# Altium PCB PCB3 - 5x5 - placement V2.PcbDoc
Units mm, origin at the board's own origin, x right, y up, seen from the top; angles counter-clockwise.
Board outline 50 x 50 mm, 2 copper layers (Top Layer, Bottom Layer); 101 components, 75 nets, 289 pads, 81 vias.
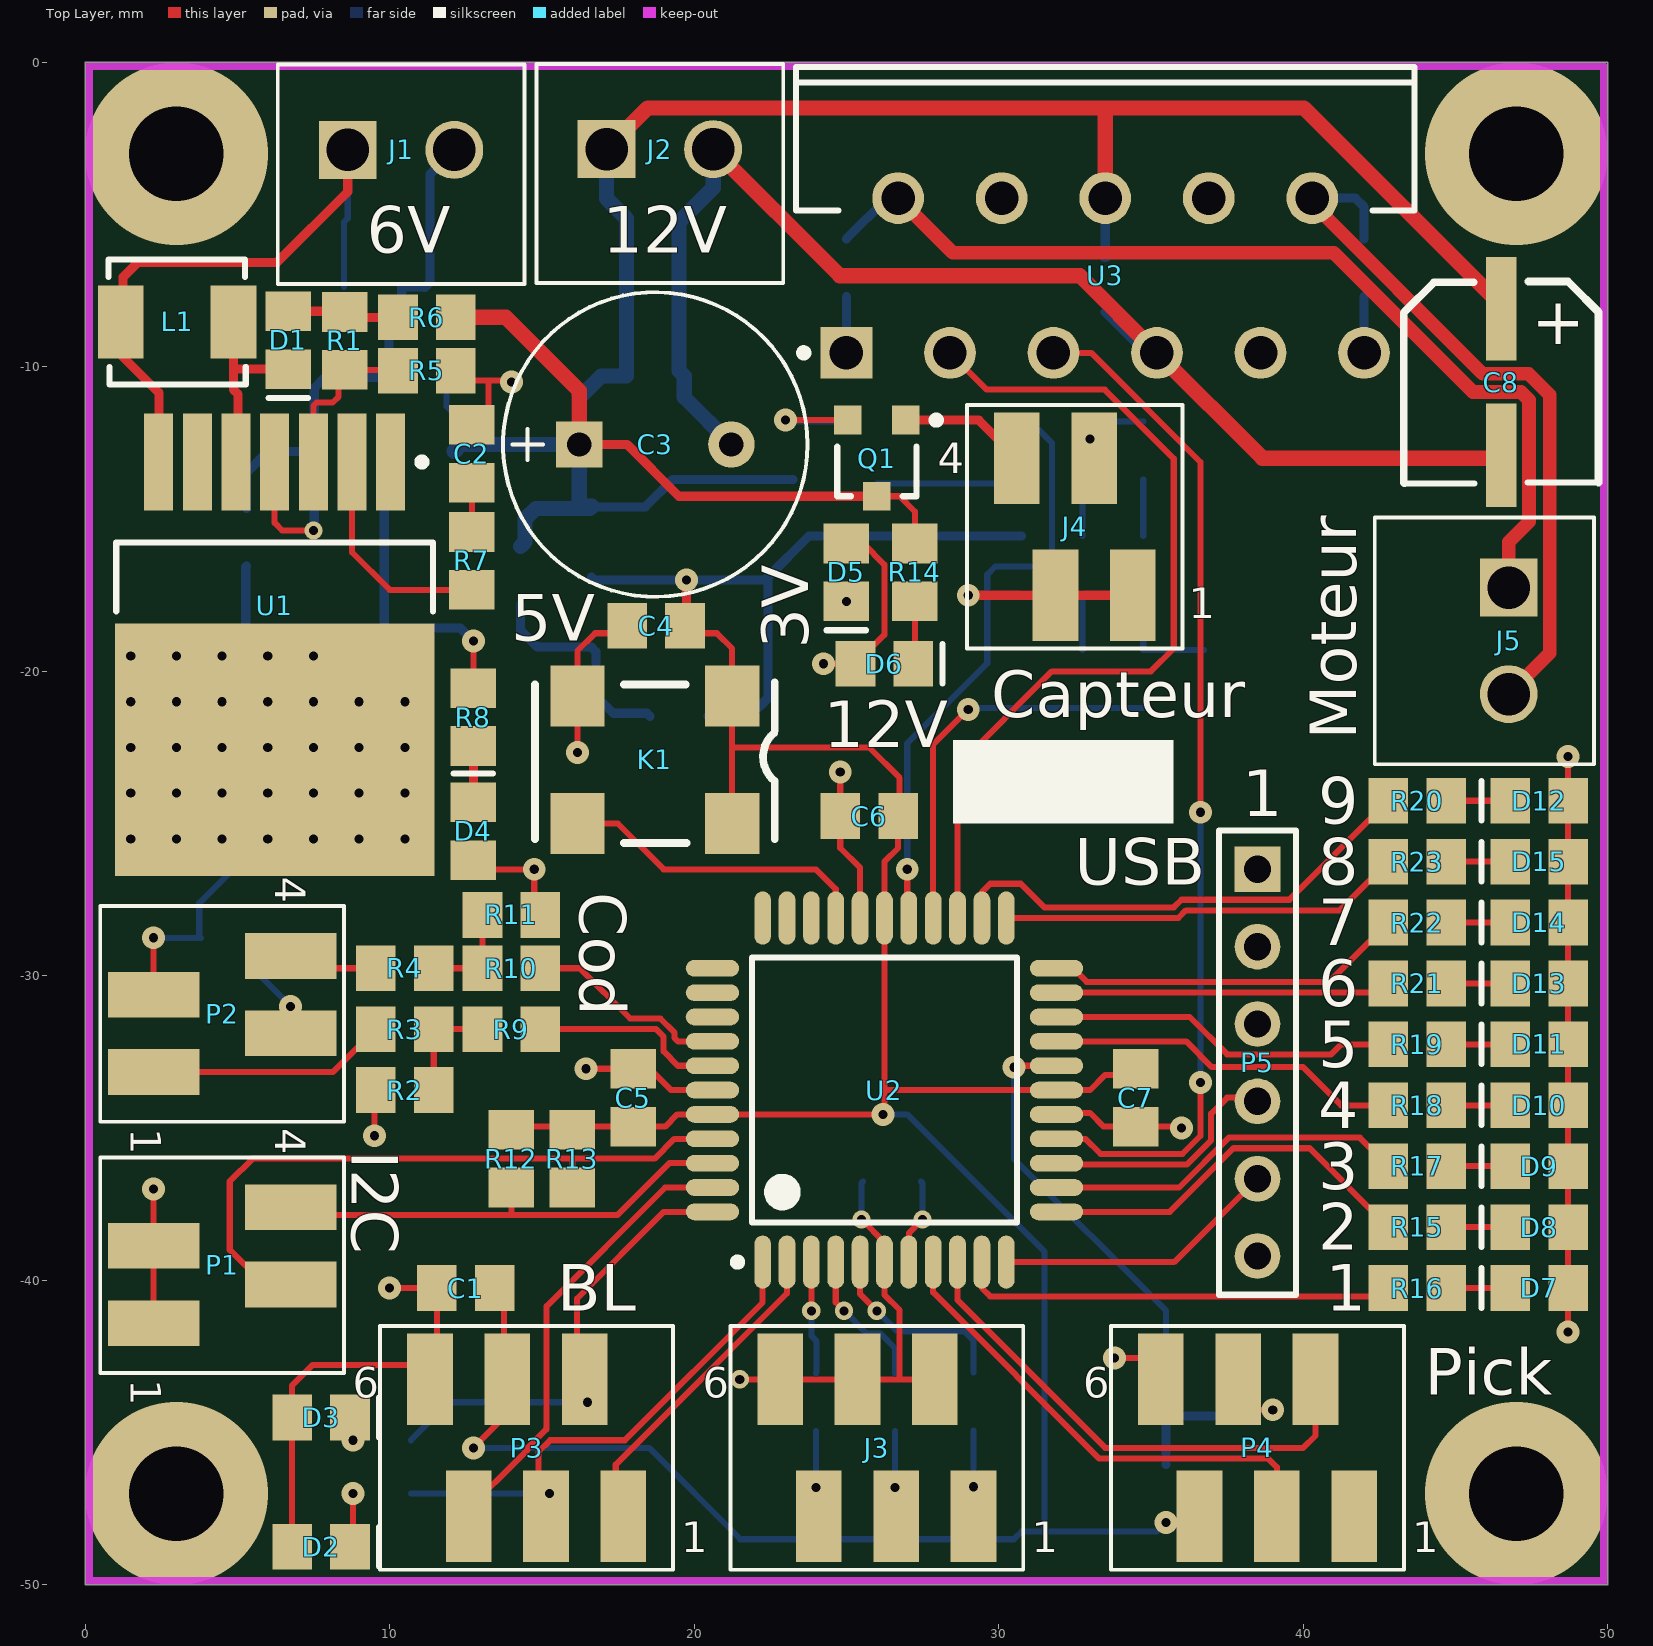
[diagram p0: Top Layer view]
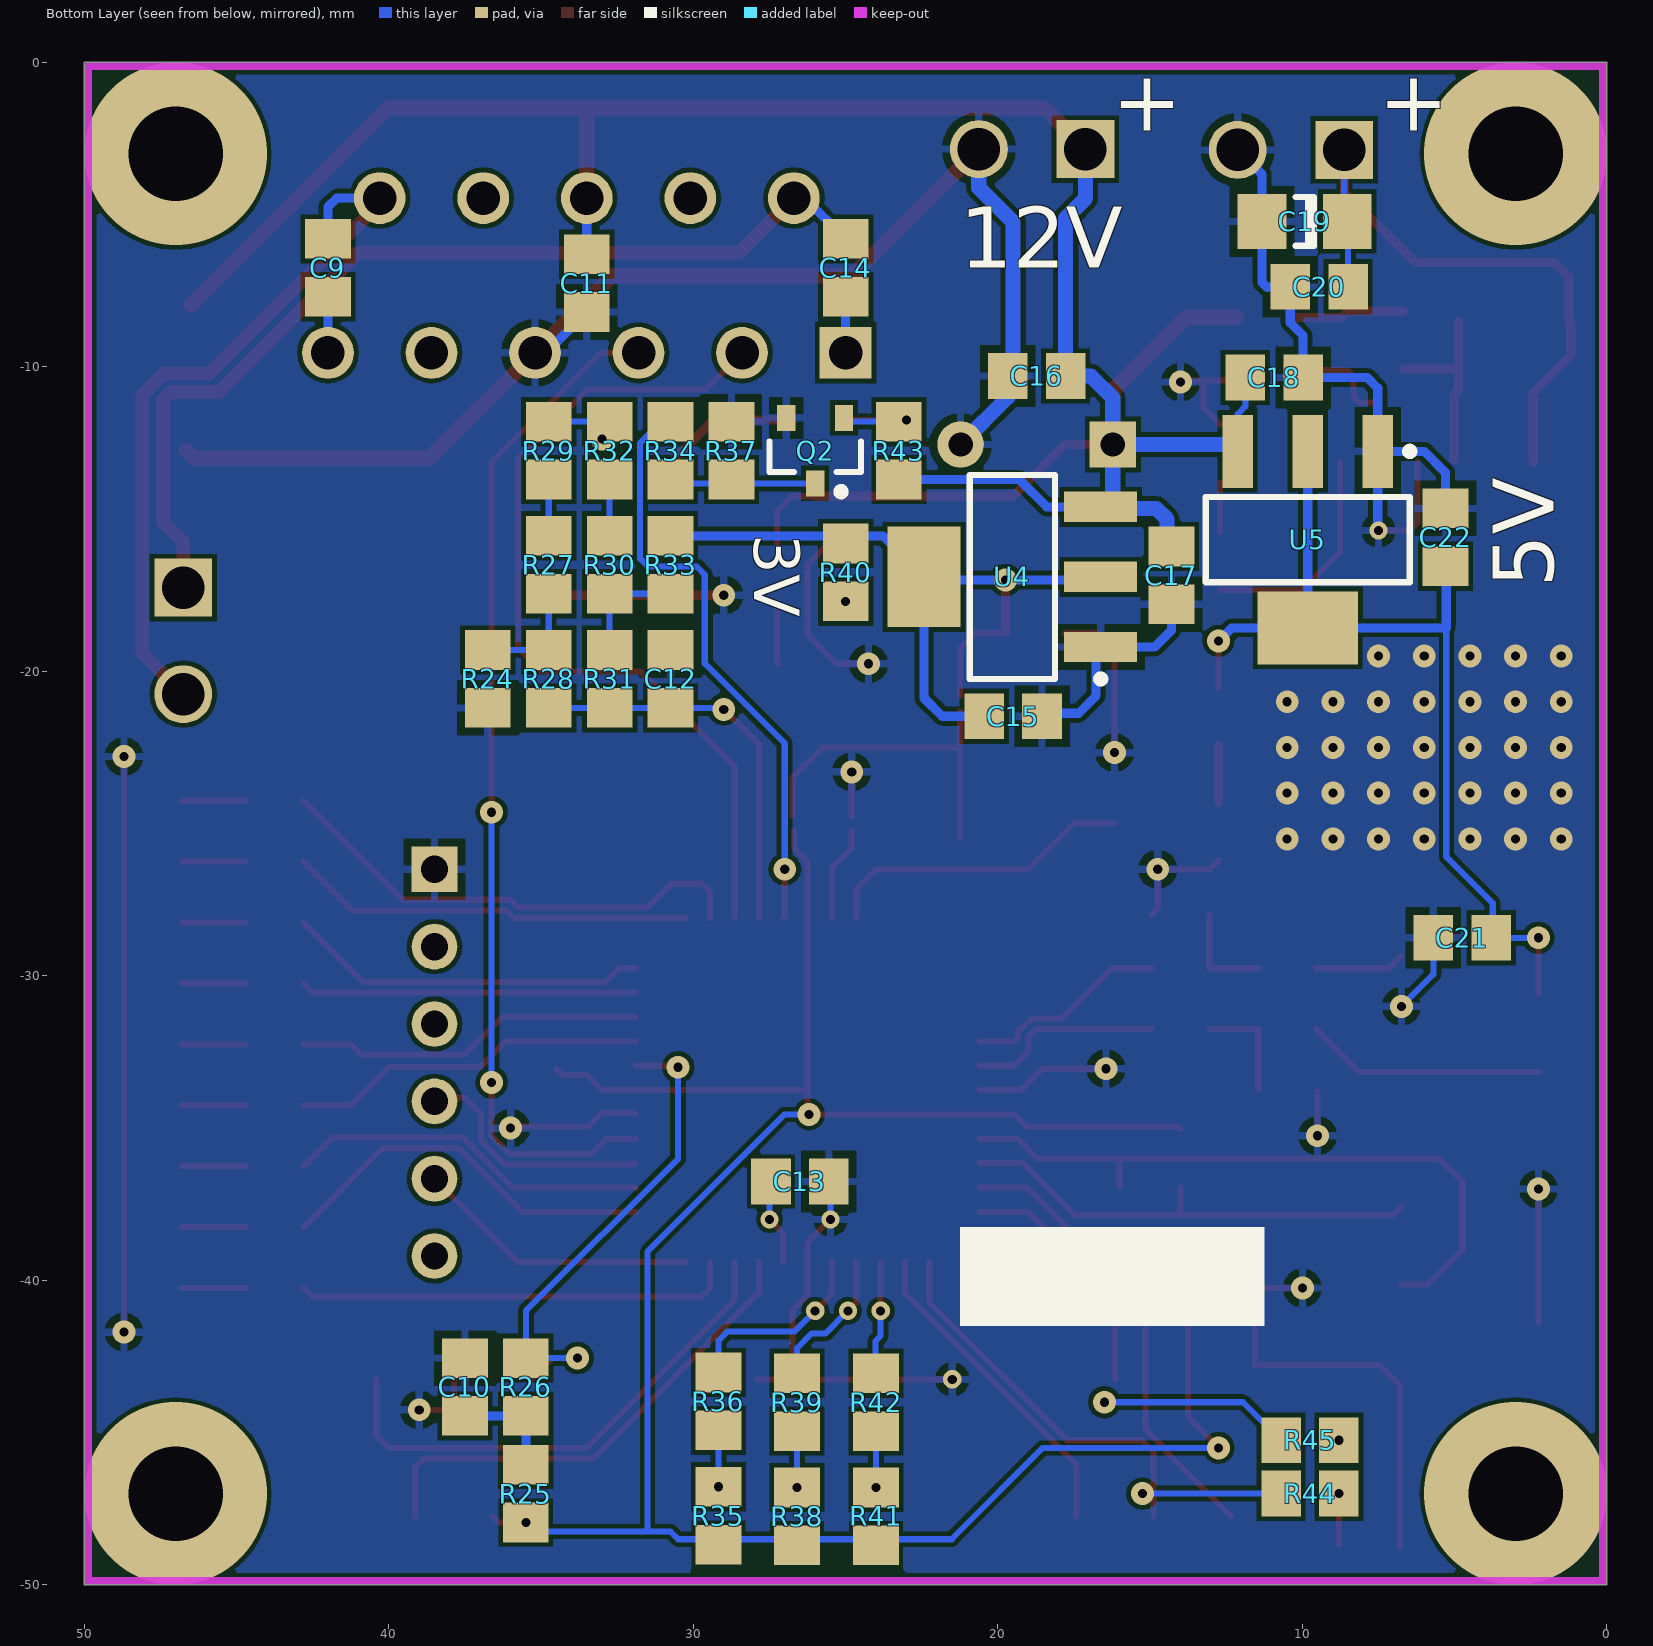
[diagram p1: Bottom Layer view, seen from below]
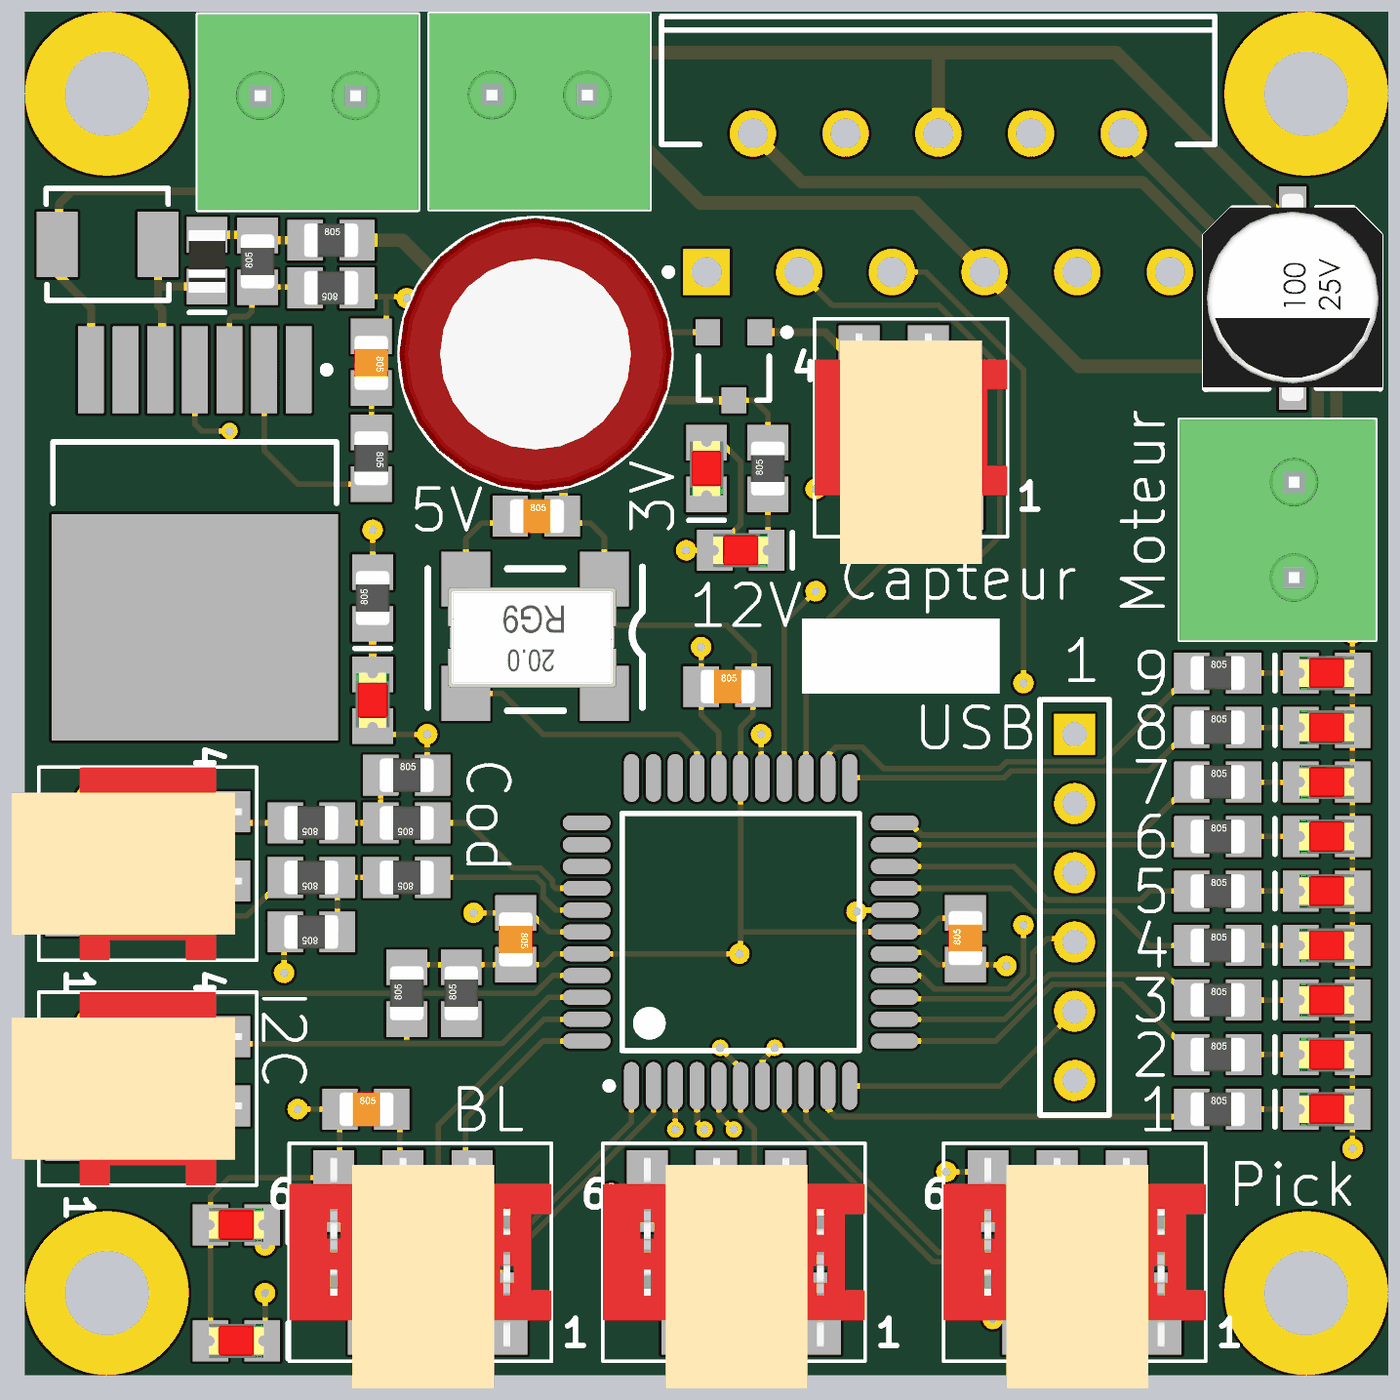
[diagram p2: 3D render of the assembled board from above, using the file's embedded part models]
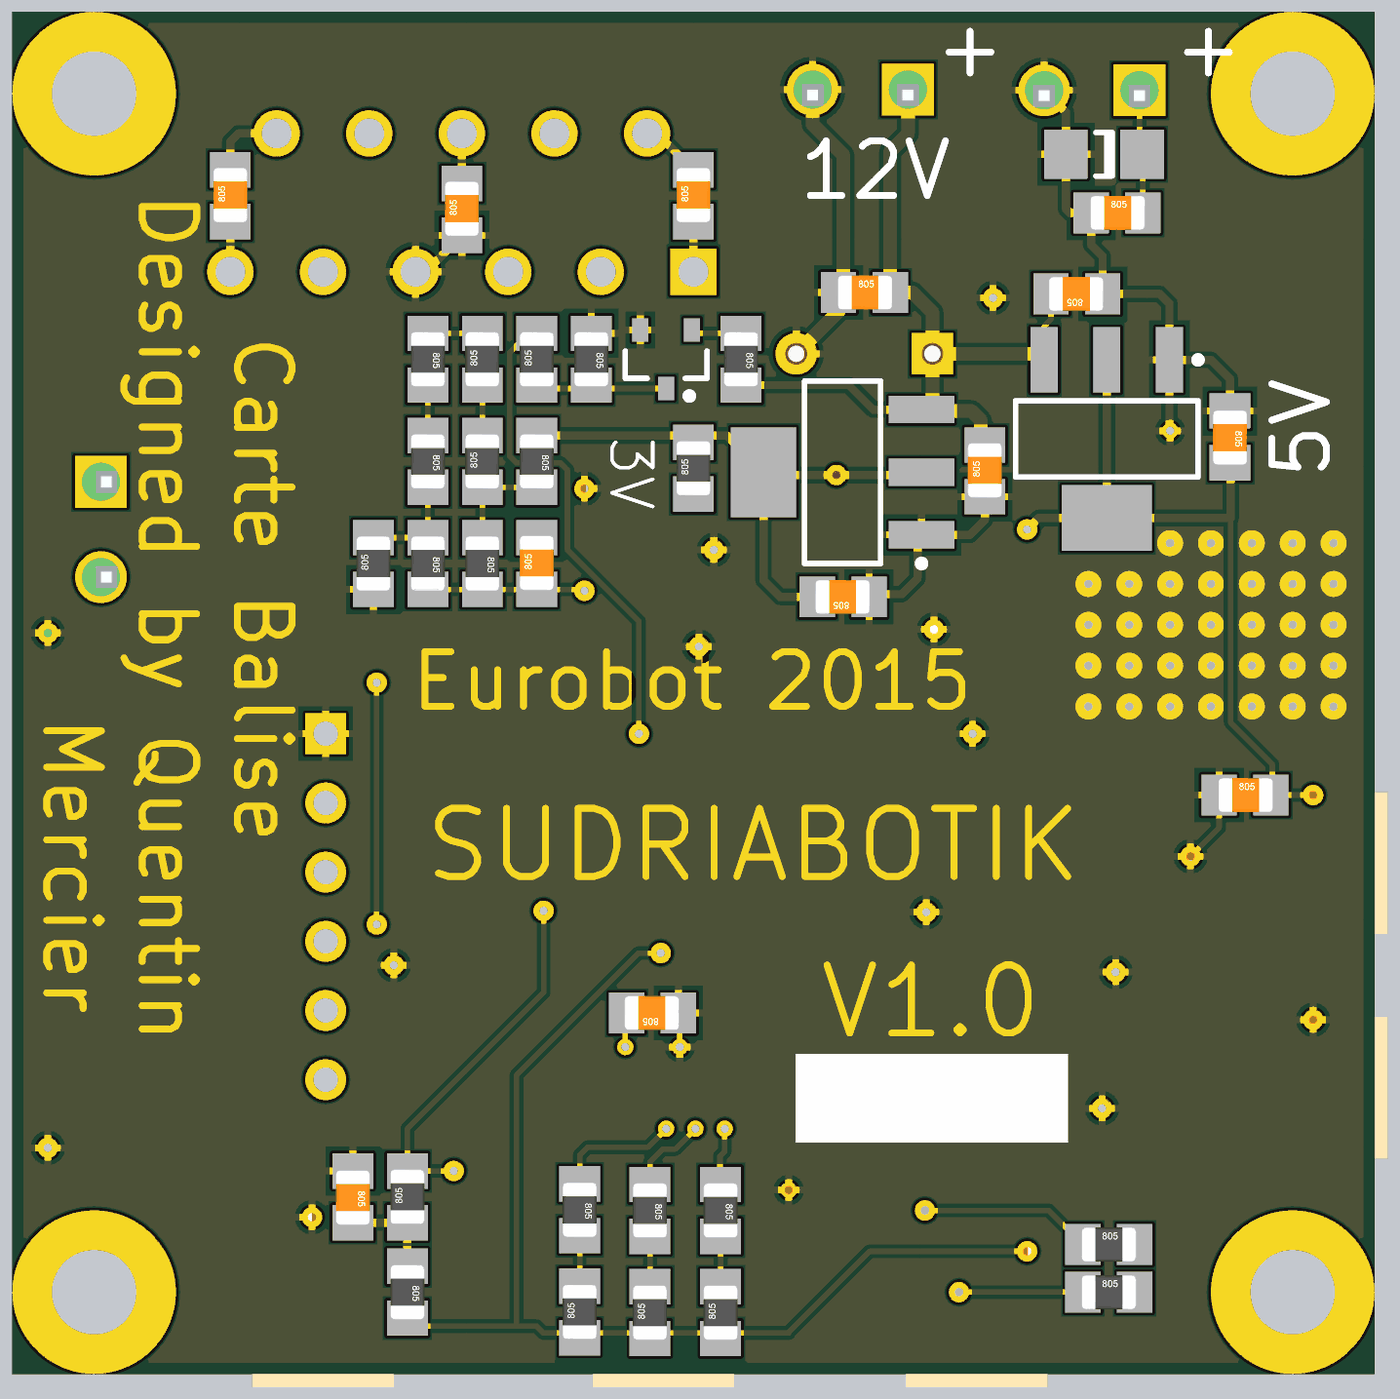
[diagram p3: 3D render of the assembled board from below, using the file's embedded part models]

## Layer stack, top to bottom
Top Solder: solder mask 0.0102, Solder Resist, Dk 3.5
Top Layer: signal copper 0.0356
Dielectric 1: dielectric 0.32, FR-4, Dk 4.8
Bottom Layer: signal copper 0.0356
Bottom Solder: solder mask 0.0102, Solder Resist, Dk 3.5

## Board outline
0,0 50,0 50,-50 0,-50

## Design rules (kind name [scope] priority, off if disabled: settings)
Clearance "Stitching GND" [IsStitchingVia and InNet('GND') vs (IsVia and (Not IsStitchingVia)) Or IsPad] p1: gap=0.127
Clearance Clearance_2 [InNamedPolygon('GND_L02_P001')] p2: gap=0.2
Clearance Clearance_1 [InNamedPolygon('GND_L02_P001')] p3: gap=0.254
Clearance [All] p4: gap=0.15
MinimumSolderMaskSliver [All] p1: minsoldermaskwidth=0.127
PolygonConnect "test 1" [All vs IsNamedPolygon('plan boost')] p1: connectstyle=Direct reliefconductorwidth=0.254 reliefentries=4 polygonreliefangle="90 Angle" airgapwidth=0.254
PolygonConnect [All] p2: connectstyle=Relief reliefconductorwidth=0.254 reliefentries=4 polygonreliefangle="90 Angle" airgapwidth=0.254
RoutingVias [All] p1: holewidth=0.3 width=0.75 viastyle="Through Hole" minholewidth=0.3 minwidth=0.6 maxholewidth=4 maxwidth=6
SilkToSilkClearance [All] p1: silktosilkclearance=0.127
SilkToSolderMaskClearance [IsPad] p1: minsilkscreentomaskgap=0.127 clearancetoexposedcopper=TRUE
SolderMaskExpansion [All] p1: expansion=0.102
Width [All] p1: maxlimit=2 minlimit=0.2 preferedwidth=0.2
27 further rules are at their usual default settings.

## Classes and differential pairs
component class "Sheet 4 - Capteurs": C12 J3 J4 Q1 Q2 R24 R27 R28 R29 R30 R31 R32 R33 R34 R35 R36 R37 R38 R39 R41 R42 R43
component class "Sheet 3 - Alims": C2 C3 C15 C16 C17 C18 C19 C20 C22 D1 D4 D5 D6 J1 J2 L1 R1 R5 R6 R7 R8 R14 R40 U1 U4 U5
component class "Sheet 2 - Moteurs": C8 C9 C11 C14 C21 J5 P2 R2 R3 R4 R9 R10 R11 U3
component class "Sheet 1 - Micro": C1 C4 C5 C6 C7 C10 C13 D2 D3 D7 D8 D9 D10 D11 D12 D13 D14 D15 K1 P1 P3 P4 P5 R12 R13 R15 R16 R17 R18 R19 R20 R21 R22 R23 R25 R26 R44 R45 R46 U2

## Components (designator, comment, footprint, x,y, rotation, side; value= is the part's Value field where it differs from the comment)
C1 "100pF" C0805 12.5,-40.25 r0 top
C2 "200nF" C0805 12.7,-12.85 r270 top
C3 "1200uF" CAPA_D10_E5 18.725,-12.55 r0 top
C4 "100nF" C0805 18.75,-18.5 r0 top
C5 "100nF" C0805 18,-34 r270 top
C6 "100nF" C0805 25.75,-24.75 r0 top
C7 "100nF" C0805 34.5,-34 r90 top
C8 "220uF" "CAPA CMS D6.3_E1.8" 46.5,-10.5 r90 top
C9 "10nF" C0805 42,-6.75 r90 bottom
C10 "0.1uF" C0805 37.5,-43.5 r270 bottom
C11 "1uF" C0805 33.5,-7.25 r90 bottom
C12 "100pF" C0805 30.75,-20.25 r90 bottom
C13 "100nF" C0805 26.5,-36.75 r0 bottom
C14 "10nF" C0805 25,-6.75 r90 bottom
C15 "10uF" C0805 19.5,-21.475 r0 bottom
C16 "100nF" C0805 18.725,-10.3 r180 bottom
C17 "1UF" C0805 14.3,-16.85 r90 bottom
C18 "1uF" C0805 10.925,-10.35 r0 bottom
C19 "100uF" C1206 9.925,-5.225 r0 bottom
C20 "100nF" C0805 9.45,-7.375 r180 bottom
C21 "100nF" C0805 4.75,-28.75 r180 bottom
C22 "10uF" C0805 5.3,-15.6 r270 bottom
D1 "D Schottky" D0805 6.675,-9.125 r90 top
D2 "LED" "LED 0805" 7.75,-48.75 r180 top
D3 "LED" "LED 0805" 7.75,-44.5 r180 top
D4 "LED" "LED 0805" 12.75,-25.25 r270 top
D5 "LED" "LED 0805" 25,-16.75 r90 top
D6 "LED" "LED 0805" 26.25,-19.75 r180 top
D7 "LED" "LED 0805" 47.75,-40.25 r0 top
D8 "LED" "LED 0805" 47.75,-38.25 r0 top
D9 "LED" "LED 0805" 47.75,-36.25 r0 top
D10 "LED" "LED 0805" 47.75,-34.25 r0 top
D11 "LED" "LED 0805" 47.75,-32.25 r0 top
D12 "LED" "LED 0805" 47.75,-24.25 r0 top
D13 "LED" "LED 0805" 47.75,-30.25 r0 top
D14 "LED" "LED 0805" 47.75,-28.25 r0 top
D15 "LED" "LED 0805" 47.75,-26.25 r0 top
J1 "WE Type 691321100002" 691321100002 10.375,-2.875 r0 top
J2 "WE Type 691321100002" 691321100002 18.875,-2.85 r0 top
J3 "Mini connect" 690367280676 26,-45.5 r0 top
J4 "WE 4 pins" 690367280476 32.5,-15.25 r0 top
J5 "WE Type 691321100002" 691321100002 46.75,-19 r270 top
K1 "Quartz 10Mhz" IQXO-70 21.25,-25 r180 top
L1 "15uH" "INDUCTANCE 4.06 X 4.45" 3.025,-8.525 r0 top
P1 "mini connect" 690367280476 4.5,-39.5 r270 top
P2 "WE 4 pins" 690367280476 4.5,-31.25 r270 top
P3 "Mini connect" 690367280676 14.5,-45.5 r0 top
P4 "mini connect" 690367280676 38.5,-45.5 r0 top
P5 "Header 6" HDR1X6 38.5,-26.5 r270 top
Q1 "MOSFET P" SOT-23 26,-13 r180 top
Q2 "Transistor NPN" SOT23_L 26,-12.75 r270 bottom
R1 "17K4" 0805 8.525,-9.15 r90 top
R2 "15K" 0805 10.5,-33.75 r180 top
R3 "10K" 0805 10.5,-31.75 r180 top
R4 "10K" 0805 10.5,-29.75 r180 top
R5 "2K" 0805 11.225,-10.125 r180 top
R6 "0R" 0805 11.225,-8.375 r0 top
R7 "1K" 0805 12.7,-16.375 r270 top
R8 "470R" 0805 12.75,-21.5 r90 top
R9 "470R" 0805 14,-31.75 r180 top
R10 "470R" 0805 14,-29.75 r180 top
R11 "15K" 0805 14,-28 r0 top
R12 "10K" 0805 14,-36 r90 top
R13 "10K" 0805 16,-36 r90 top
R14 "1K" 0805 27.25,-16.75 r90 top
R15 "330R" 0805 43.75,-38.249 r0 top
R16 "330R" 0805 43.75,-40.25 r0 top
R17 "330R" 0805 43.75,-36.25 r0 top
R18 "330R" 0805 43.75,-34.25 r0 top
R19 "330R" 0805 43.75,-32.25 r0 top
R20 "330R" 0805 43.75,-24.25 r0 top
R21 "330R" 0805 43.75,-30.25 r0 top
R22 "330R" 0805 43.75,-28.25 r0 top
R23 "330R" 0805 43.75,-26.25 r0 top
R24 "3K4" 0805 36.75,-20.25 r90 bottom
R25 "10K" 0805 35.5,-47 r270 bottom
R26 "100R" 0805 35.5,-43.5 r90 bottom
R27 "10K" 0805 34.75,-16.5 r270 bottom
R28 "0R" 0805 34.75,-20.25 r270 bottom
R29 "0R" 0805 34.75,-12.75 r270 bottom
R30 "1K" 0805 32.75,-16.5 r90 bottom
R31 "0R" 0805 32.75,-20.25 r270 bottom
R32 "0R" 0805 32.75,-12.75 r90 bottom
R33 "215K" 0805 30.75,-16.5 r270 bottom
R34 "1K" 0805 30.75,-12.75 r90 bottom
R35 "10K" 0805 29.175,-47.725 r90 bottom
R36 "470R" 0805 29.175,-43.975 r270 bottom
R37 "10K" 0805 28.75,-12.75 r270 bottom
R38 "10K" 0805 26.595,-47.75 r90 bottom
R39 "470R" 0805 26.595,-44 r270 bottom
R40 "330R" 0805 25,-16.75 r90 bottom
R41 "10K" 0805 24,-47.75 r90 bottom
R42 "470R" 0805 24,-44 r270 bottom
R43 "10K" 0805 23.25,-12.75 r270 bottom
R44 "330R" 0805 9.75,-47 r180 bottom
R45 "330R" 0805 9.75,-45.25 r180 bottom
U1 "LM2588S-ADJ" TS7B_N 6.225,-19.125 r270 top locked
U2 "DSPIC33FJ128MC804T-I/PT" TQFP-PT44_N 26.25,-33.75 r90 top
U3 "LMD18200T" TA11B 33.5,-7 r0 top
U4 "LM1117MP-3.3" MP04A_N 19.525,-16.9 r0 bottom
U5 "LM1117IMP-5.0" MP04A_N 9.825,-15.675 r270 bottom

## Footprints (in the part's own frame and the unit in brackets; to place one, negate y for a bottom-side part, rotate by r counter-clockwise, add the part's x,y. Pads: shape width x height; smd on the part's side, far side on the other; paste and mask are expansions set on the pad)
0805 [mm] "Chip Resistor; Body 2.0 x 1.3 mm (LxW typ)"
  rect 1.3x1.5 smd: 1(-0.95,0) 2(0.95,0)
  body extent -1,-0.62 1,0.63, height 0.78
690367280476 [mm] "without Latch, 4 pins, SMT, straight"
  rect 1.5x3 smd: 1(1.905,-2.25) 2(0.635,2.25) 3(-0.635,-2.25) 4(-1.905,2.25)
  silkscreen extent -3.54,-4 3.54,4, body extent -3.54,-5 3.54,3.5, height 5.7
690367280676 [mm] "without Latch, 6 pins, SMT, straight"
  rect 1.5x3 smd: 1(3.175,-2.25) 2(1.905,2.25) 3(0.635,-2.25) 4(-0.635,2.25) 5(-1.905,-2.25) 6(-3.175,2.25)
  silkscreen extent -4.81,-4 4.81,4, body extent -4.81,-5 4.81,3.5, height 5.75
691321100002 [mm] "3,50mm - PCB Vertical - 02p"
  rect 1.9x1.9 hole 1.4: 1(-1.75,0)
  round 1.9 hole 1.4: 2(1.75,0)
  silkscreen extent -4.05,-4.4 4.05,2.8, body extent -4.05,-4.4 4.05,2.8, height 9.21
C0805 [mm] "Chip Resistor; Body 2.0 x 1.3 mm (LxW typ)"
  rect 1.3x1.5 smd: 1(-0.95,0) 2(0.95,0)
  body extent -0.97,-0.62 1.03,0.63, height 0.78
C1206 [mm] "Chip Capacitor; Body 3.2 x 1.6 mm (LxW typ)"
  rect 1.6x1.8 smd: 1(-1.4,0) 2(1.4,0)
  silkscreen extent -0.3,-0.8 0.3,0.8
"CAPA CMS D6.3_E1.8" [mm]
  rect 3.4x1 smd: 1(2.4,0) 2(-2.4,0)
  silkscreen extent -3.33,-3.2 3.3,3.2, body extent -3.77,-3.3 3.83,3.3, height 8
CAPA_D10_E5 [mm]
  rect 1.524x1.524 hole 0.8: 1(-2.5,0)
  round 1.524 hole 0.8: 2(2.5,0)
  silkscreen extent -5,-5 5,5, body extent -5,-5 5,5, height 12
D0805 [mm] "Chip Capacitor; Body 2.0 x 1.2 mm (LxW typ)"
  rect 1.3x1.5 smd: 1(-0.95,0) 2(0.95,0)
  silkscreen extent -1.9,-0.65 -1.9,0.65, body extent -1.17,-0.67 1.13,0.68, height 0.76
HDR1X6 [mm] "Connector; Header; 6 Position"
  rect 1.5x1.5 hole 0.9: 1(0,0)
  round 1.5 hole 0.9: 2(2.54,0) 3(5.08,0) 4(7.62,0) 5(10.16,0) 6(12.7,0)
  silkscreen extent -1.27,-1.27 13.97,1.27
"INDUCTANCE 4.06 X 4.45" [mm]
  rect 1.5x2.4 smd: 1(-1.85,0) 2(1.85,0)
  silkscreen extent -2.25,-2.05 2.25,2.05
IQXO-70 [mil]
  rect 70x79 smd: 1(0,-165) 2(200,-165) 3(200,0) 4(0,0)
  silkscreen extent -55,-182 255,25, body extent -18,-154 226,-8, height 48
"LED 0805" [mm] "Chip Capacitor; Body 2.0 x 1.2 mm (LxW typ)"
  rect 1.3x1.5 smd: 1(-0.95,0) 2(0.95,0)
  silkscreen extent -1.9,-0.65 -1.9,0.65, body extent -1.01,-0.62 1.01,0.63, height 1.1
MP04A_N [mm] "SOT223, 4-Leads, Body 6.5x3.5mm, Pitch 2.3mm, Lead Span 7mm, IPC Medium Density"
  rect 2.4x1 smd: 1(-2.9,2.3) 2(-2.9,0) 3(-2.9,-2.3)
  rect 2.4x3.3 smd: 4(2.9,0)
  silkscreen extent -3.02,-3.35 1.4,3.47, body extent -1.85,-3.35 1.85,3.35, height 1.8
SOT23_L [mm] "SOT23, 3-Leads, Body 2.9x1.3mm, Pitch 0.95mm, Lead Span 2.3mm - Reverse Pinning, IPC High Density"
  rect 0.85x0.6 smd: 1(1.075,0) 2(-1.075,-0.95) 3(-1.075,0.95)
  silkscreen extent -0.3,-1.5 1.47,1.5, body extent -0.7,-1.5 0.7,1.5, height 1.1
SOT-23 [mm] "SOT-23; 3 Leads; Body 3.0 x 2.6 mm, inc. leads (LxW max)"
  rect 0.9x0.95 smd: 1(-0.95,-1.25) 2(0.95,-1.25) 3(0,1.25)
  silkscreen extent -2.08,-1.37 1.3,1.25
TA11B [mm] "TO, Thru-Hole, Vertical, Heatsink Mounted; 11 Bent Staggered Leads; Pitch 1.7 mm"
  rect 1.7x1.7 hole 1.1: 1(-8.5,-2.54)
  round 1.7 hole 1.1: 2(-6.8,2.54) 3(-5.1,-2.54) 4(-3.4,2.54) 5(-1.7,-2.54) 6(0,2.54) 7(1.7,-2.54) 8(3.4,2.54) 9(5.1,-2.54) 10(6.8,2.54) 11(8.5,-2.54)
  silkscreen extent -10.15,-2.66 10.15,6.84, body extent -10.15,2.14 10.15,6.84, height 21
TQFP-PT44_N [mm] "Thin QFP, 44-Leads, Body 10x10mm, Pitch 0.8mm, IPC Medium Density"
  oval 1.75x0.55 smd: 1(-5.65,4) 2(-5.65,3.2) 3(-5.65,2.4) 4(-5.65,1.6) 5(-5.65,0.8) 6(-5.65,0) 7(-5.65,-0.8) 8(-5.65,-1.6) 9(-5.65,-2.4) 10(-5.65,-3.2) 11(-5.65,-4) 23(5.65,-4) 24(5.65,-3.2) 25(5.65,-2.4) 26(5.65,-1.6) 27(5.65,-0.8) 28(5.65,0) 29(5.65,0.8) 30(5.65,1.6) 31(5.65,2.4) 32(5.65,3.2) 33(5.65,4)
  oval 0.55x1.75 smd: 12(-4,-5.65) 13(-3.2,-5.65) 14(-2.4,-5.65) 15(-1.6,-5.65) 16(-0.8,-5.65) 17(0,-5.65) 18(0.8,-5.65) 19(1.6,-5.65) 20(2.4,-5.65) 21(3.2,-5.65) 22(4,-5.65) 34(4,5.65) 35(3.2,5.65) 36(2.4,5.65) 37(1.6,5.65) 38(0.8,5.65) 39(0,5.65) 40(-0.8,5.65) 41(-1.6,5.65) 42(-2.4,5.65) 43(-3.2,5.65) 44(-4,5.65)
  silkscreen extent -5.77,-4.35 4.35,4.95, body extent -5,-5 5,5, height 1.2
TS7B_N [mm] "D2-PAK, 8-Leads, Body 8.6x10.2mm, Pitch 1.27mm, Lead Span 14.1mm, IPC Medium Density"
  rect 3.2x0.95 smd: 1(-6,3.81) 2(-6,2.54) 3(-6,1.27) 4(-6,0) 5(-6,-1.27) 6(-6,-2.54) 7(-6,-3.81)
  rect 8.3x10.5 smd: 8(3.45,0)
  silkscreen extent -6.12,-5.2 -1.1,5.2, body extent -3.35,-5.2 6.05,5.2, height 4.64

## Part data
C1 C2 C4 C5 C6 C7 C9 C10 C11 C12 C13 C14 C15 C16 C17 C18 C20 C21 C22: library part Cap, "Capacitor 0805"
C3: library part Cap2, "EEUFM1C122L"
C8: library part Cap2, "EEEFK1C221XP"
C19: library part Cap2, "Capacitor 1206"
D1: "Schottky Diode 0805"
D2 D3 D4 D5 D6 D7 D8 D9 D10 D11 D12 D13 D14 D15: library part LED2, "Typical RED, GREEN, YELLOW, AMBER GaAs LED 0805"
J1 J2 J5: library part "WE-Terminal Blocks Plugable Type 691321100002", "WR-TBL Terminal block - serie 3211 - 3.50 mm"
J3 P3 P4: library part MHDR1X6, "Header, 6-Pin"
J4: library part "MICRO-MATCH FOB.04P", "connecteur WE"
K1: library part OSCILLATEUR, "Oscillateur quartz"
L1: library part Inductor, "SRP4020TA-150M"
P1 P2: library part MHDR1X4, "Header, 4-Pin"
P5: "Header, 6-Pin"
Q1: library part PMOS-2, "P-Channel Power MOSFET"
Q2: library part QNPN, "NPN Bipolar Transistor"
R1 R2 R3 R4 R5 R6 R7 R8 R9 R10 R11 R12 R13 R14 R15 R16 R17 R18 R19 R20 R21 R22 R23 R24 R25 R26 R27 R28 R29 R30 R31 R32 R33 R34 R35 R36 R37 R38 R39 R40 R41 R42 R43 R44 R45: library part Res3, "Resistor 0805"
U1: "SIMPLE SWITCHER 5A Flyback Regulator with Shutdown"
U2: "High-Performance 16-bit Digital Signal Controller, 128 KB Flash, 16 KB RAM, 44-Pin TQFP, Industrial Temperature, Tape and Reel"
U3: "3A, 55V H-Bridge"
U4 U5: "800mA Low-Dropout Linear Regulator"

## Via types
v1: diameter 0.75, hole 0.3, Top Layer to Bottom Layer, 67 vias
v2: diameter 0.6, hole 0.3, Top Layer to Bottom Layer, 10 vias
v3: diameter 6, hole 3.1, Top Layer to Bottom Layer, 4 vias

## Nets (pads, with @x,y where several pads share a name; then routed paths per layer and width w, separated by ;. In a path a pad name is that pad's centre, name@x,y a point inside that pad or via, vN(x,y) a via of type N, cw(c..) or ccw(c..) an arc to the next point about the centre after c; other vN are vias at no path point)
3.3V: C1.2 C4.2 C5.2 C6.2 C7.2 C15.2 K1.1 K1.4 P3.4 P4.5 R12.2 R13.2 R25.2 R33.1 R35.1 R38.1 R40.2 R41.1 U2.17 U2.28 U2.40 U4.2 U4.4 | length 115.4
  Top Layer w0.2: v1(12.75,-45.5) 13.75,-44.5 13.75,-40.55 C1.2 ; R12.2 14.1,-34.95 C5.2 19.05,-34.95 19.45,-34.55 U2.40 v1(26.2,-34.55) 26.25,-34.5 26.25,-33.75 ; C4.2@19.7,-18.75 20.75,-18.75 21.25,-19.25 K1.1 ; K1.4@21.25,-25.5 K1.4 21.25,-22.5 ; K1.1@21.25,-21.309 21.25,-22.5 ; C6.2@26.7,-25.25 26.7,-25.8 26.25,-26.25 U2.28 26.25,-33.75 ; C6.2@26.75,-24.75 26.75,-23.5 25.75,-22.5 21.25,-22.5 ; C7.2 34.3,-33.25 33.5,-33.25 33,-33.75 U2.17 26.25,-33.75 ; v1(35.5,-47.95) 36.395,-47.95 P4.5
  Top Layer w0.3: C4.2@19.75,-18.7 v1(19.75,-17)
  Bottom Layer w0.2: v1(12.75,-45.5) 18.525,-45.5 21.5,-48.475 21.5,-48.5 30.5,-48.5 30.75,-48.25 35.2,-48.25 v1(35.5,-47.95) ; v1(26.2,-34.55) 27.004,-34.55 31.5,-39.046 31.5,-48.25
  Bottom Layer w0.3: U4.2 16.725,-17 v1(19.75,-17) 22.325,-17 U4.4 ; C15.2 21.825,-21.475 22.425,-20.875 U4.4 ; R33.1 23.775,-15.55 U4.4
5V: C21.2 C22.2 P2.3 R8.2 U5.2 U5.4 | length 31.3
  Top Layer w0.2: P2.3 v1(2.25,-28.75) ; R8.2 v1(12.75,-19)
  Bottom Layer w0.2: v1(2.25,-28.75) C21.2 3.75,-28.7 3.75,-27.61 5.275,-26.085 5.275,-18.575
  Bottom Layer w0.3: C22.2 5.275,-16.575 5.275,-18.575 U5.4 ; U5.2 U5.4 ; v1(12.75,-19) 12.325,-18.575 U5.4
"6V IN": C19.1 C20.2 J1.1 L1.1 U1.7 | length 21.2
  Top Layer w0.3: U1.7 2.425,-13.115 2.425,-10.85 1.175,-9.6 L1.1 1.25,-8.6 1.25,-7.05 1.725,-6.575 6.3,-6.575 8.625,-4.25 J1.1
  Bottom Layer w0.2: C20.2 8.5,-5.25 C19.1 8.625,-5.125 J1.1
12V: C3.1 C8.1 C11.2 C16.2 C17.2 C18.2 J2.1 Q1.3 R6.2 R14.2 R43.2 U3.6 U4.3 U5.3 | length 87.8
  Top Layer w0.2: Q1.3 26.75,-14.25 27.25,-14.75 R14.2
  Top Layer w0.3: C3.1 17.8,-12.55 19.5,-14.25 Q1.3
  Top Layer w0.5: R6.2 13.825,-8.375 16.225,-10.775 C3.1 ; J2.1 18.475,-1.5 33.5,-1.5 ; U3.6 33.5,-1.5 ; C8.1@46.5,-7.973 40.027,-1.5 33.5,-1.5
  Bottom Layer w0.2: C18.2 11.875,-11.3 12.125,-11.55 U5.3
  Bottom Layer w0.3: U4.3 18.4,-14.6 19.3,-13.7 R43.2 ; C11.2 U3.6
  Bottom Layer w0.5: U5.3 12.35,-12.55 C3.1 ; C17.2 14.45,-15.75 14.45,-15 14.8,-14.65 16.575,-14.65 U4.3 16.65,-14.575 16.225,-14.575 C3.1 ; J2.1 17.125,-4.475 17.775,-5.125 C16.2 16.95,-10.3 16.225,-11.025 C3.1
B1: R36.1 U2.5 | length 6.5
  Top Layer w0.2: U2.5 25.45,-40.45 v2(26,-41)
  Bottom Layer w0.2: v2(26,-41) 26.675,-41.675 28.875,-41.675 29.175,-41.975 R36.1
B2: R39.1 U2.4 | length 4.7
  Top Layer w0.2: U2.4 24.65,-40.725 v2(24.925,-41)
  Bottom Layer w0.2: v2(24.925,-41) 25.675,-41.75 26.125,-41.75 26.595,-42.22 R39.1
B3: R42.1 U2.3 | length 3.7
  Top Layer w0.2: v2(23.85,-41) U2.3
  Bottom Layer w0.2: v2(23.85,-41) 23.85,-41.825 24.025,-42 24.025,-43.025 R42.1
"B 1": J3.1 R35.2 R36.2 | length 1.8
  Bottom Layer w0.2: v2(29.175,-46.775) R36.2
"B 2": J3.3 R38.2 R39.2 | length 1.8
  Bottom Layer w0.2: v2(26.595,-46.8) R39.2
"B 3": J3.5 R41.2 R42.2 | length 1.8
  Bottom Layer w0.2: v2(24,-46.8) R42.2
"C IN": J4.2 R29.1 R32.2 | length 2.7
  Bottom Layer w0.2: v1(33,-12.375) 33,-12.25 32.75,-12 R32.2 R29.1
CAPTEUR: C12.1 R28.2 R31.2 U2.26 | length 13.1
  Top Layer w0.2: U2.26 27.85,-22.4 v1(29,-21.25)
  Bottom Layer w0.2: v1(29,-21.25) 29.05,-21.2 C12.1 R31.2 R28.2
CLOCK: K1.3 U2.30 | length 10.3
  Top Layer w0.2: K1.3 17.5,-25 19,-26.5 24,-26.5 24.65,-27.15 U2.30
COMP: R7.2 U1.2 | length 7.4
  Top Layer w0.2: U1.2 8.765,-16.09 10,-17.325 R7.2
"EN CAPTEUR": J4.4 Q1.1 | length 4.2
  Top Layer w0.3: Q1.1 29.345,-11.75 J4.4
"ENABLE BL": P3.1 U2.2 | length 10.7
  Top Layer w0.2: P3.1@17.425,-47.75 17.425,-46.046 23.05,-40.421 U2.2
"ENABLE CAPT": R34.2 U2.27 | length 20.4
  Top Layer w0.2: v1(27,-26.5) 27,-28.05 U2.27
  Bottom Layer w0.2: v1(27,-26.5) 27,-22.366 29.625,-19.741 29.625,-16.821 29.896,-16.55 31.504,-16.55 31.75,-16.304 31.75,-14.796 31.75,-12.5 31.05,-11.8 R34.2@30.996,-11.8 ; R34.2@30.996,-11.8 R34.2 30.75,-12.046 R34.2@30.996,-11.8
FB: R1.1 R5.2 U1.3 | length 5.5
  Top Layer w0.2: U1.3 7.495,-11.28 7.6,-11.175 8.125,-11.175 8.325,-10.975 8.325,-10.3 R1.1 10.25,-10.1 R5.2
GND: C1.1 C2.1 C3.2 C4.1 C5.1 C6.1 C7.1 C8.2 C10.1 C11.1 C12.2 C13.1 C15.1 C16.1 C17.1 C18.1 C19.2 C20.1 C21.1 C22.1 D2.2 D3.2 D4.2 D5.2 D6.2 D7.2 D8.2 D9.2 D10.2 D11.2 D12.2 D13.2 D14.2 D15.2 J1.2 J2.2 J3.2 J3.4 J3.6 J4.1 J4.3 K1.2 P1.1 P1.3 P2.2 P3.6 P4.4 P5.1 Q2.2 R2.2 R5.1 R11.2 R24.1 R37.1 U1.4 U1.8 U2.6 U2.16 U2.29 U2.39 U3.7 U4.1 U5.1 | length 170.1
  Top Layer w0.2: P1.1 P1.3 v1(2.25,-37) ; U1.4 6.225,-15.125 6.475,-15.375 v2(7.5,-15.375) ; D2.2 6.8,-43.45 7.475,-42.775 11.55,-42.775 C1.1 v1(10,-40.25) ; v1(9.5,-35.25) R2.2@9.5,-33.8 ; R5.1 12.175,-10.425 12.2,-10.45 13.95,-10.45 v1(14,-10.5) ; C2.1 13.25,-11.35 13.25,-10.45 ; D4.2 13.05,-26.5 v1(14.75,-26.5) 14.75,-27.8 R11.2 ; v1(16.17,-22.67) K1.2 16.17,-19.33 16.75,-18.75 C4.1@17.8,-18.75 ; v1(16.45,-33.05) C5.1 18.55,-33.05 19.25,-33.75 U2.39 ; v2(21.5,-43.25) J3.6 J3.4 J3.2 26.75,-43.25 26.75,-40.972 26.25,-40.472 U2.6 26.25,-38.75 v2(25.5,-38) ; v1(24.25,-19.75) D6.2 26.25,-18.8 26.25,-16.5 25.55,-15.8 D5.2 ; C6.1@24.8,-25.25 24.8,-25.8 25.45,-26.45 U2.29 ; C6.1 v1(24.8,-23.3) ; U2.16 31.95,-34.5 33,-34.5 33.45,-34.95 C7.1 35.95,-34.95 v1(36,-35) ; P4.4 37.865,-44.25 v1(39,-44.25) ; v1(48.7,-41.7) D7.2 D8.2 D9.2 D10.2 D11.2 D12.2 v1(48.7,-22.8)
  Top Layer w0.3: v1(29,-17.5) J4.3 J4.1
  Top Layer w0.5: J2.2 24.785,-7.01 32.67,-7.01 U3.7 38.66,-13 46.4,-13 C8.2 C8.2@46.65,-12.75
  Bottom Layer w0.2: C21.1 5.7,-29.95 v1(6.75,-31) ; v2(25.5,-38) 25.5,-36.8 C13.1
  Bottom Layer w0.3: C22.1 5.3,-13.475 6,-12.775 U5.1 ; v2(7.5,-15.375) 7.525,-15.35 U5.1 ; J1.2 11.325,-3.675 C19.2 11.325,-7.225 11.15,-7.4 11.125,-7.375 C20.1 10.4,-8.55 9.975,-8.975 C18.1 7.875,-10.35 7.525,-10.7 U5.1 ; C17.1 14.3,-18.65 14.85,-19.2 U4.1 16.775,-19.35 16.775,-20.8 17.35,-21.375 18.45,-21.375 C15.1 ; C11.1 34.84,-9.54 U3.7
  Bottom Layer w0.5: J2.2 20.625,-4.125 19.5,-5.25 19.5,-10.125 C16.1 19.675,-11 C3.2
  other v1: 1.5,-25.5 3,-25.5 4.5,-25.5 6,-25.5 7.5,-25.5 9,-25.5 10.5,-25.5 1.5,-24 3,-24 4.5,-24 6,-24 7.5,-24 9,-24 10.5,-24 1.5,-22.5 3,-22.5 4.5,-22.5 6,-22.5 7.5,-22.5 9,-22.5 10.5,-22.5 1.5,-21 3,-21 4.5,-21 6,-21 7.5,-21 9,-21 10.5,-21 1.5,-19.5 3,-19.5 4.5,-19.5 6,-19.5 7.5,-19.5
"LED 1": R16.1 U2.10 | length 14.4
  Top Layer w0.2: U2.10 29.45,-40.25 29.725,-40.525 42.525,-40.525 R16.1
"LED 2": R15.1 U2.12 | length 12.8
  Top Layer w0.2: U2.12 35.619,-37.75 37.709,-35.66 40.21,-35.66 R15.1
"LED 3": R17.1 U2.13 | length 12
  Top Layer w0.2: U2.13 35.924,-36.95 37.564,-35.31 41.86,-35.31 R17.1
"LED 4": R18.1 U2.19 | length 11.8
  Top Layer w0.2: U2.19 36.159,-32.15 37.004,-32.996 39.996,-32.996 41.25,-34.25 R18.1
"LED 5": R19.1 U2.20 | length 11.5
  Top Layer w0.2: U2.20 36.27,-31.35 37.5,-32.58 40.92,-32.58 41.25,-32.25 R19.1
"LED 6": R21.1 U2.21 | length 11
  Top Layer w0.2: U2.21 42.5,-30.55 R21.1
"LED 7": R22.1 U2.22 | length 11.9
  Top Layer w0.2: U2.22 32.442,-29.75 32.892,-30.2 40.85,-30.2 R22.1
"LED 8": R23.1 U2.23 | length 13.3
  Top Layer w0.2: U2.23 35.9,-28.1 36.15,-27.85 41.2,-27.85 R23.1
"LED 9": R20.1 U2.24 | length 16.1
  Top Layer w0.2: U2.24 29.45,-27.25 29.725,-26.975 30.725,-26.975 31.5,-27.75 35.755,-27.75 36.005,-27.5 39.55,-27.5 R20.1
M+: C14.2 J5.1 U3.2 | length 32.2
  Top Layer w0.45: U3.2 28.49,-6.25 41,-6.25 45.575,-10.825 45.845,-10.825 47.155,-10.825 47.415,-11.085 47.415,-15.085 46.75,-15.75 J5.1
  Bottom Layer w0.3: C14.2 26.34,-4.46 U3.2
M-: C9.2 J5.2 U3.10 | length 23.7
  Top Layer w0.45: U3.10@40.3,-4.63 45.895,-10.225 47.404,-10.225 48.1,-10.921 48.1,-19.4 J5.2
  Bottom Layer w0.3: U3.10 41.71,-4.46 42,-4.75 C9.2
MCLR: P4.6 R26.2 U2.18 | length 16.6
  Top Layer w0.2: v1(30.5,-33) 30.55,-32.95 U2.18 ; v1(33.8,-42.55) 34.625,-42.55 P4.6
  Bottom Layer w0.2: v1(30.5,-33) 30.5,-36 35.5,-41 R26.2 v1(33.8,-42.55)
NetC2_2: C2.2 R7.1 | length 1.6
  Top Layer w0.2: R7.1 C2.2
NetC9_1: C9.1 U3.11 | length 1.8
  Bottom Layer w0.3: U3.11 C9.1
NetC10_2: C10.2 R25.1 R26.1 | length 3.6
  Bottom Layer w0.3: R25.1 R26.1 C10.2
NetC14_1: C14.1 U3.1 | length 1.8
  Bottom Layer w0.3: U3.1 C14.1
NetD1_1: D1.1 L1.2 U1.5 | length 6.4
  Top Layer w0.3: L1.2 4.875,-10.025 ; U1.5@5.025,-13.055 5.025,-10.9 4.875,-10.75 4.875,-10.025 ; D1.1 4.925,-10.075 4.875,-10.025
NetD1_2: D1.2 R1.2 R6.1 | length 3.7
  Top Layer w0.3: D1.2 8.5,-8.175 R1.2 8.7,-8.375 R6.1
NetD2_1: D2.1 R44.2 | length 1.6
  Top Layer w0.2: D2.1@8.8,-48.65 v1(8.8,-47)
NetD3_1: D3.1 R45.2
  other v1: 8.8,-45.25
NetD4_1: D4.1 R8.1 | length 1.9
  Top Layer w0.3: D4.1 R8.1
NetD5_1: D5.1 R40.1 | length 0.1
  Top Layer w0.3: v1(25,-17.7) D5.1@25.05,-17.75
  Bottom Layer w0.3: v1(25,-17.7) R40.1@25.05,-17.75
NetD6_1: D6.1 R14.1 | length 2.1
  Top Layer w0.2: D6.1 27.25,-19.7 R14.1
NetD7_1: D7.1 R16.2 | length 2.1
  Top Layer w0.2: R16.2 D7.1
NetD8_1: D8.1 R15.2 | length 2.1
  Top Layer w0.2: R15.2 D8.1
NetD9_1: D9.1 R17.2 | length 2.1
  Top Layer w0.2: R17.2 D9.1
NetD10_1: D10.1 R18.2 | length 2.1
  Top Layer w0.2: R18.2 D10.1
NetD11_1: D11.1 R19.2 | length 2.1
  Top Layer w0.2: R19.2 D11.1
NetD12_1: D12.1 R20.2 | length 2.1
  Top Layer w0.2: R20.2 D12.1
NetD13_1: D13.1 R21.2 | length 2.1
  Top Layer w0.2: R21.2 D13.1
NetD14_1: D14.1 R22.2 | length 2.1
  Top Layer w0.2: R22.2 D14.1
NetD15_1: D15.1 R23.2 | length 2.1
  Top Layer w0.2: R23.2 D15.1
NetQ1_1: Q1.2 Q2.3 R43.1 | length 3.9
  Top Layer w0.2: v1(23,-11.75) Q1.2
  Bottom Layer w0.2: R43.1 24.925,-11.8 Q2.3
NetQ2_1: Q2.1 R34.1 R37.2 | length 4.8
  Bottom Layer w0.2: Q2.1 30.625,-13.825 R34.1
NetR2_1: R2.1 R3.1 R9.2 | length 3.6
  Top Layer w0.2: R2.1 R3.1 R9.2
NetR4_1: R4.1 R10.2 R11.1 | length 3.4
  Top Layer w0.2: R4.1 R10.2 R11.1
NetR24_2: R24.2 R27.2 R28.1 | length 3.9
  Bottom Layer w0.2: R27.2 R28.1 R24.2
NetR27_1: R27.1 R29.2 | length 1.8
  Bottom Layer w0.2: R27.1 R29.2
NetR30_1: R30.1 R31.1 R33.2 | length 3.9
  Bottom Layer w0.2: R33.2 R30.1 R31.1
NetR30_2: R30.2 R32.1 | length 1.8
  Bottom Layer w0.2: R30.2 R32.1
PGC: P4.2 U2.9 | length 17
  Top Layer w0.2: U2.9 28.65,-40.65 33.5,-45.5 40,-45.5 40.405,-45.095 P4.2
PGD: P4.3 U2.8 | length 16.3
  Top Layer w0.2: U2.8 27.85,-40.396 33.304,-45.85 38.85,-45.85 39.135,-46.135 P4.3
PWM: U2.15 U3.5 | length 33.6
  Top Layer w0.2: U3.5 33.04,-9.54 36.625,-13.125 v1(36.625,-24.625) ; U2.15 32.85,-35.35 33.35,-35.85 36.034,-35.85 36.625,-35.259 v1(36.625,-33.5)
  Bottom Layer w0.2: v1(36.625,-33.5) v1(36.625,-24.625)
QEA: R10.1 U2.37 | length 6.7
  Top Layer w0.2: R10.1 16.25,-29.75 17.9,-31.4 18.895,-31.4 19.35,-31.855 19.35,-32.03 19.47,-32.15 U2.37
"QEA IN": P2.4 R4.2 | length 3
  Top Layer w0.2: P2.4 7.155,-29.75 R4.2
QEB: R9.1 U2.38 | length 6.4
  Top Layer w0.2: R9.1 18.75,-31.75 19,-32 19,-32.48 19.47,-32.95 U2.38
"QEB IN": P2.1 R3.2 | length 7.9
  Top Layer w0.2: P2.1 8.145,-33.155 R3.2
"RX BL": P3.3 R44.1 U2.1 | length 17.4
  Top Layer w0.2: P3.3@14.885,-47.75 14.885,-45.635 15.27,-45.25 17.726,-45.25 22.25,-40.726 U2.1
  Bottom Layer w0.2: R44.1 v1(15.25,-47)
"RX USB": P5.4 U2.14 | length 8.1
  Top Layer w0.2: U2.14 31.95,-36.2 36.179,-36.2 36.975,-35.404 36.975,-34.525 37.5,-34 38.38,-34 P5.4
SCL: P1.4 R12.1 U2.42 | length 15.6
  Top Layer w0.2: P1.4 7.005,-37.85 14,-37.85 ; R12.1 14,-37.85 ; U2.42 19.19,-36.15 17.49,-37.85 14,-37.85
SDA: P1.2 R13.1 U2.41 | length 22.1
  Top Layer w0.2: P1.2 5.885,-40.135 4.75,-39 4.75,-36.75 5.5,-36 16,-36 ; R13.1 16,-36 ; U2.41 19.354,-35.35 18.704,-36 16,-36
"SENS MOT": U2.25 U3.3 | length 28.7
  Top Layer w0.2: U3.3 29.61,-10.75 33.489,-10.75 35.75,-13.011 35.75,-19.25 35,-20 31.75,-20 28.65,-23.1 U2.25
"STATUS BL": P3.5 U2.43 | length 15.1
  Top Layer w0.2: P3.5@12.345,-47.75 14.535,-45.56 14.535,-45.49 15.125,-44.9 15.155,-44.9 15.155,-40.845 19.05,-36.95 U2.43
"TX BL": P3.2 R45.1 U2.44 | length 14.6
  Top Layer w0.2: P3.2@16.155,-43.25 16.155,-40.595 19,-37.75 U2.44
  Bottom Layer w0.2: R45.1 11.95,-44 v1(16.5,-44)
"TX USB": P5.5 U2.11 | length 9.4
  Top Layer w0.2: U2.11 35.76,-39.4 P5.5
VCAP: C13.2 U2.7 | length 2.9
  Top Layer w0.2: U2.7 27.05,-38.45 v2(27.5,-38)
  Bottom Layer w0.2: C13.2 27.5,-36.8 v2(27.5,-38)
pads on no net: P4.1 P5.2 P5.3 P5.6 U1.1 U1.6 U2.31 U2.32 U2.33 U2.34 U2.35 U2.36 U3.4 U3.8 U3.9
copper on no net:
  other v3: 3,-47 47,-47 3,-3 47,-3

## Polygon pours and split planes (outlines as drawn)
GND on Bottom Layer "plan boost" (solid, remove dead copper, pour order 0): 0.511,-18.5 13.011,-18.5 13.011,-26.5 0.511,-26.5
GND on Bottom Layer "Plan de masse" (solid, remove dead copper, pour order 1): 0,0 50,0 50,-50 0,-50

## Keep-outs
Keep-Out Layer:
  lines w0.254: 0.125,-49.875 0.125,-0.125 49.875,-0.125 49.875,-49.875 0.125,-49.875

## Silkscreen, mask and mechanical layers (free items; w line width, h text height)
Top Overlay:
  region: 35.75,-22.25 28.5,-22.25 28.5,-25 35.75,-25
  text "6V" at 9.25,-6.25 h1.52
  text "12V" at 17,-6.25 h1.52
  text "+" at 47.5,-9.25 h1.52
  text "5V" at 14,-19 h1.52
  text "3V" at 23.75,-19.25 h1.52 r90
  text "Capteur" at 29.75,-21.5 h1.52
  text "Moteur" at 41.75,-22.25 h1.52 r90
  text "12V" at 24.25,-22.5 h1.52
  text "1" at 38,-24.75 h1.52
  text "9" at 40.5,-25 h1.52
  text "USB" at 32.5,-27 h1.52
  text "8" at 40.5,-27 h1.52
  text "Cod" at 16.25,-27.25 h1.52 r270
  text "7" at 40.5,-29 h1.52
  text "6" at 40.5,-31 h1.52
  text "5" at 40.5,-33 h1.52
  text "4" at 40.5,-35 h1.52
  text "I2C" at 8.75,-35.75 h1.52 r270
  text "3" at 40.5,-37 h1.52
  text "2" at 40.5,-39 h1.52
  text "BL" at 15.5,-41 h1.52
  text "1" at 40.75,-41 h1.52
  text "Pick" at 44,-43.75 h1.52
Bottom Overlay:
  region: 21.25,-41.5 21.25,-38.25 11.25,-38.25 11.25,-41.5
  text "+" at 7.5,-2.25 h2
  text "+" at 16.25,-2.25 h2
  text "12V" at 21.25,-6.75 h2
  text "3V" at 28,-15.5 h1.5 r90
  text "5V" at 1.75,-17.25 h2 r270
Bottom Solder:
  text "Designed by Quentin" at 45.25,-6.5 h2 r90
  text "Carte Balise" at 41.75,-11.75 h2 r90
  text "Eurobot 2015" at 35.5,-25.5 h2
  text "Mercier" at 48.75,-25.75 h2 r90
  text "SUDRIABOTIK" at 35,-31.75 h2.5
  text "V1.0" at 20.5,-37.5 h2.5

## Text inside footprints (layer, text, board x,y; h text height)
J3: Top Overlay "6" at 20.285,-43.849 h1; Top Overlay "1" at 31.08,-48.929 h1
J4: Top Overlay "1" at 36.25,-18.25 h1; Top Overlay "4" at 28,-13.5 h1
P1: Top Overlay "4" at 6.25,-35 h1 r270; Top Overlay "1" at 1.5,-43.25 h1 r270
P2: Top Overlay "1" at 1.5,-35 h1 r270; Top Overlay "4" at 6.25,-26.75 h1 r270
P3: Top Overlay "6" at 8.785,-43.849 h1; Top Overlay "1" at 19.58,-48.929 h1
P4: Top Overlay "6" at 32.785,-43.849 h1; Top Overlay "1" at 43.58,-48.929 h1
R28: Mechanical 28 "PNP" at 34.3,-21.6 h1 r270
R29: Mechanical 28 "PNP" at 34.175,-14.15 h1 r270
R31: Mechanical 28 "NPN" at 32.225,-21.65 h1 r270
R32: Mechanical 28 "NPN" at 32.225,-14.15 h1 r270
U4: Mechanical 28 "A 3.3V" at 22.525,-17.1 h1
U5: Mechanical 28 "A 5v" at 11.55,-16.525 h1